# Allegro board comms_command_pc104_revK.brd
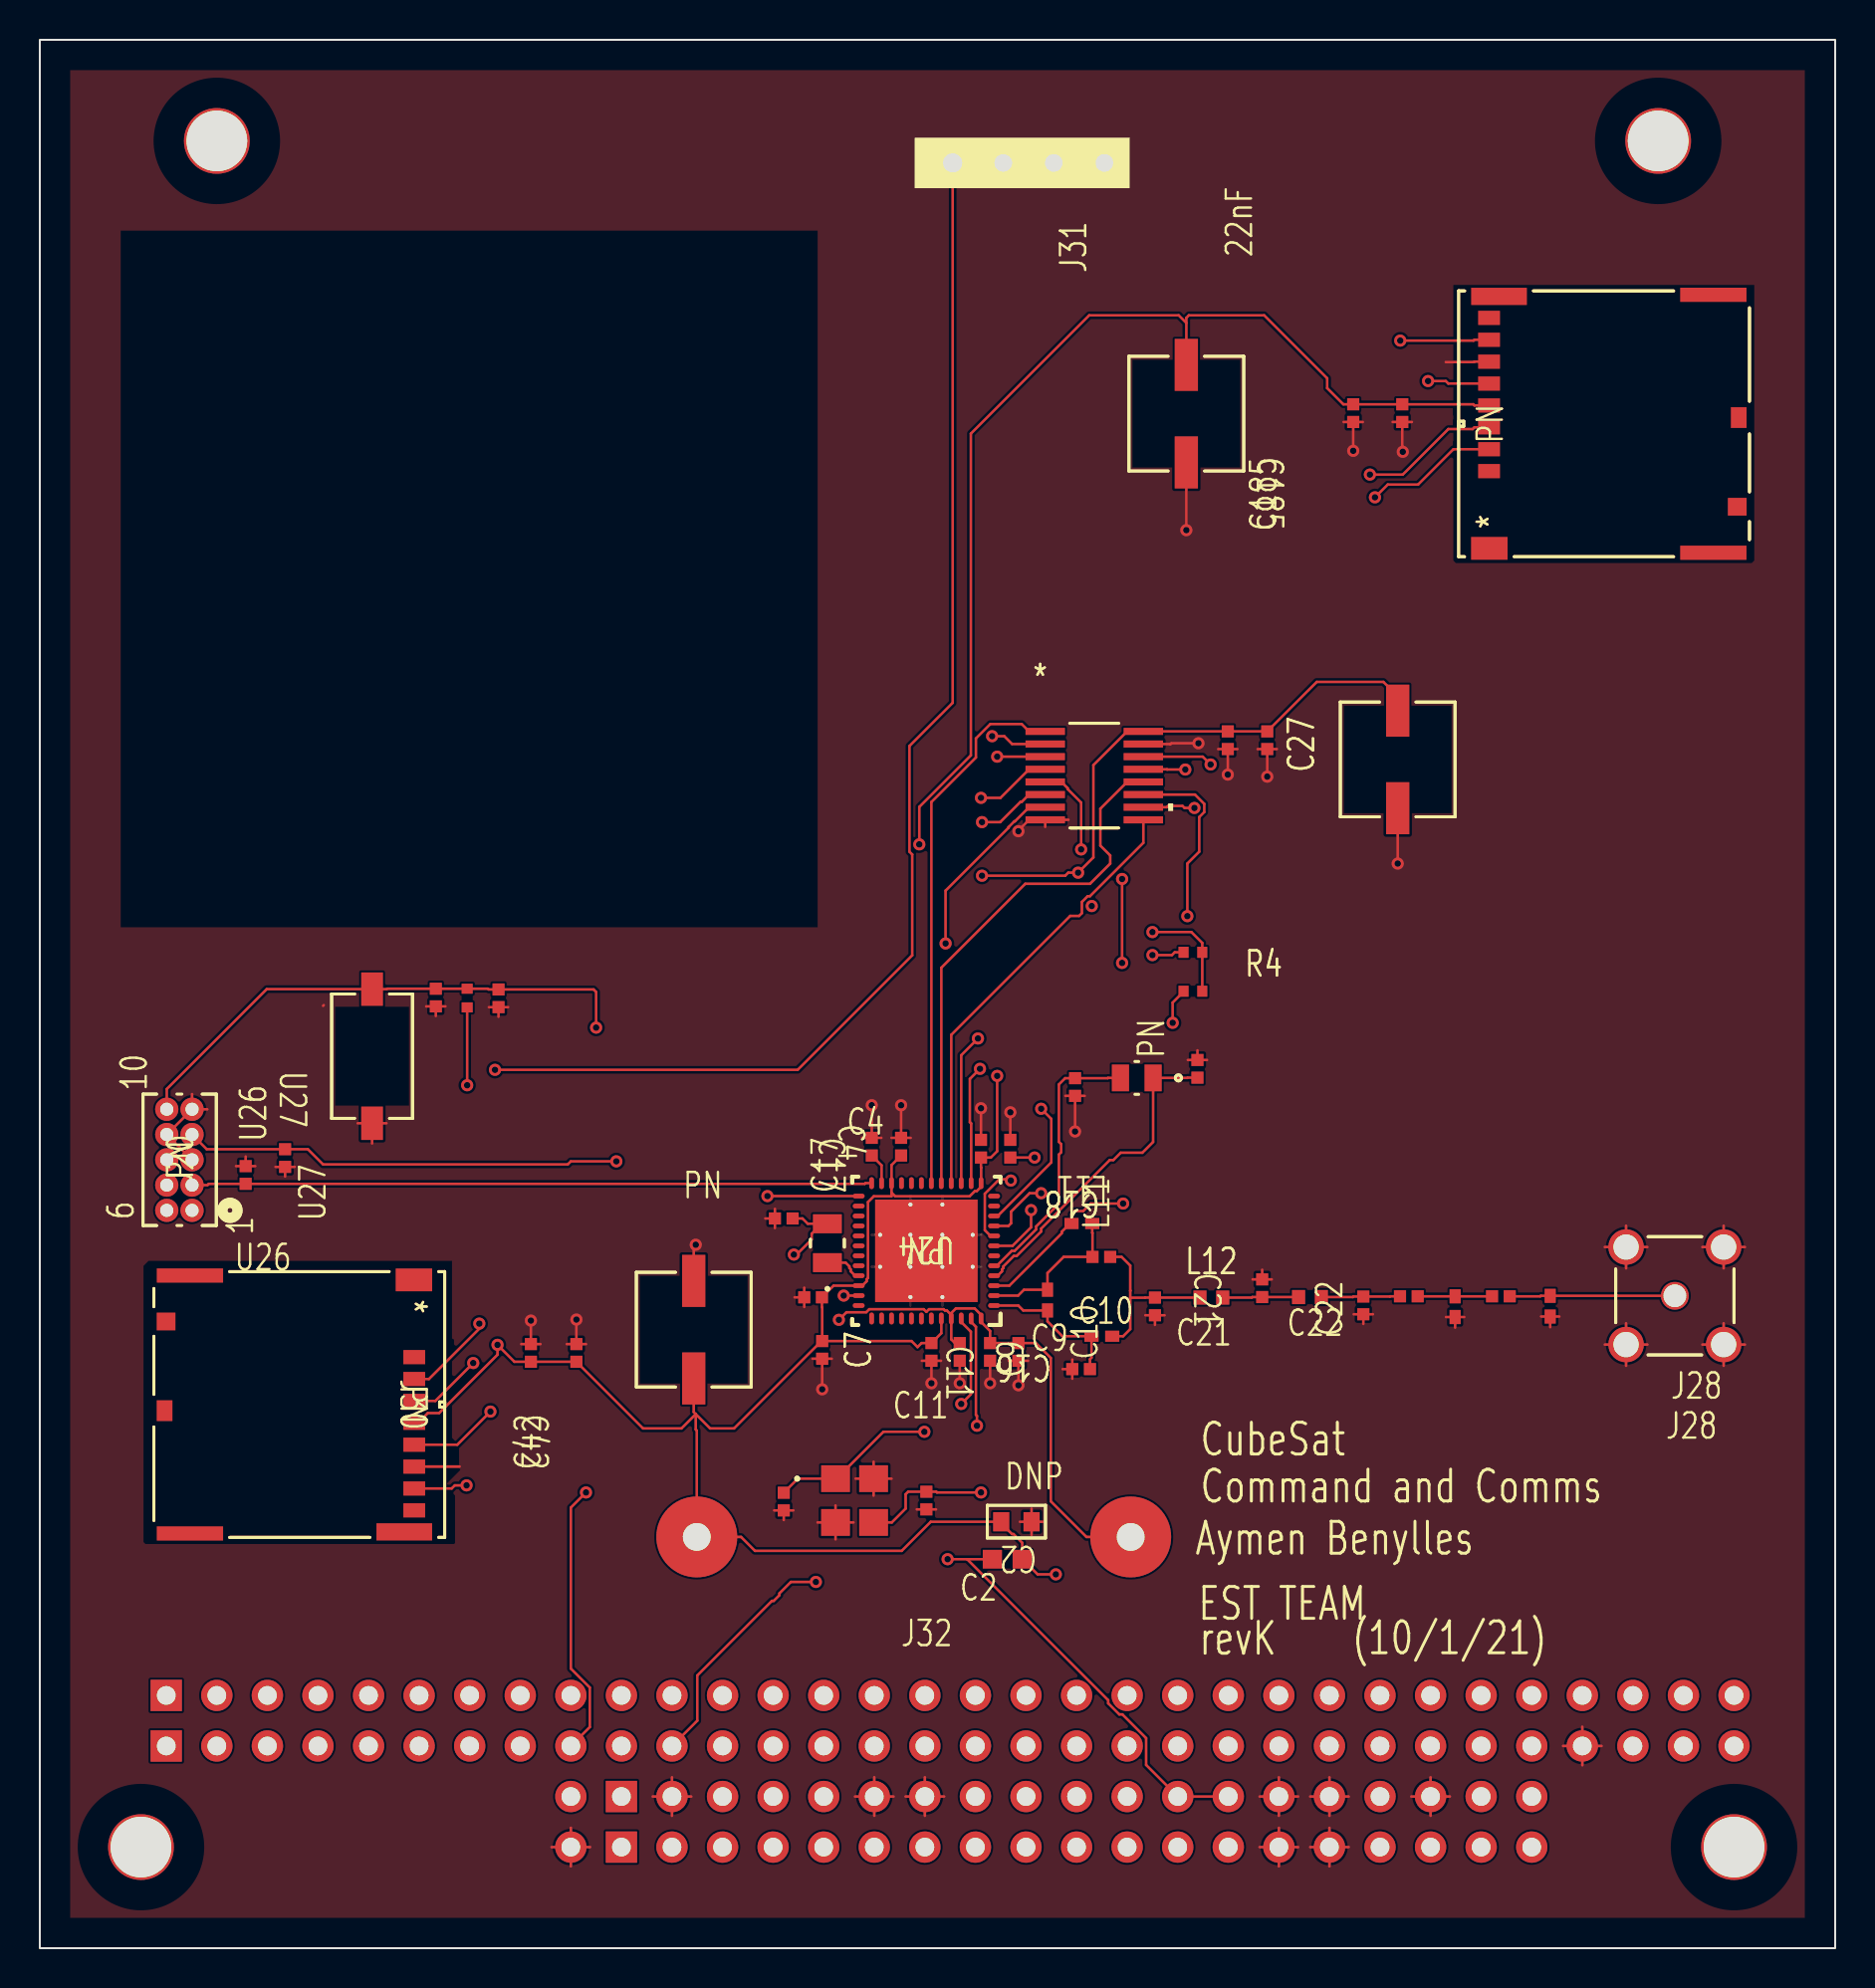
[diagram p0: board, top side]
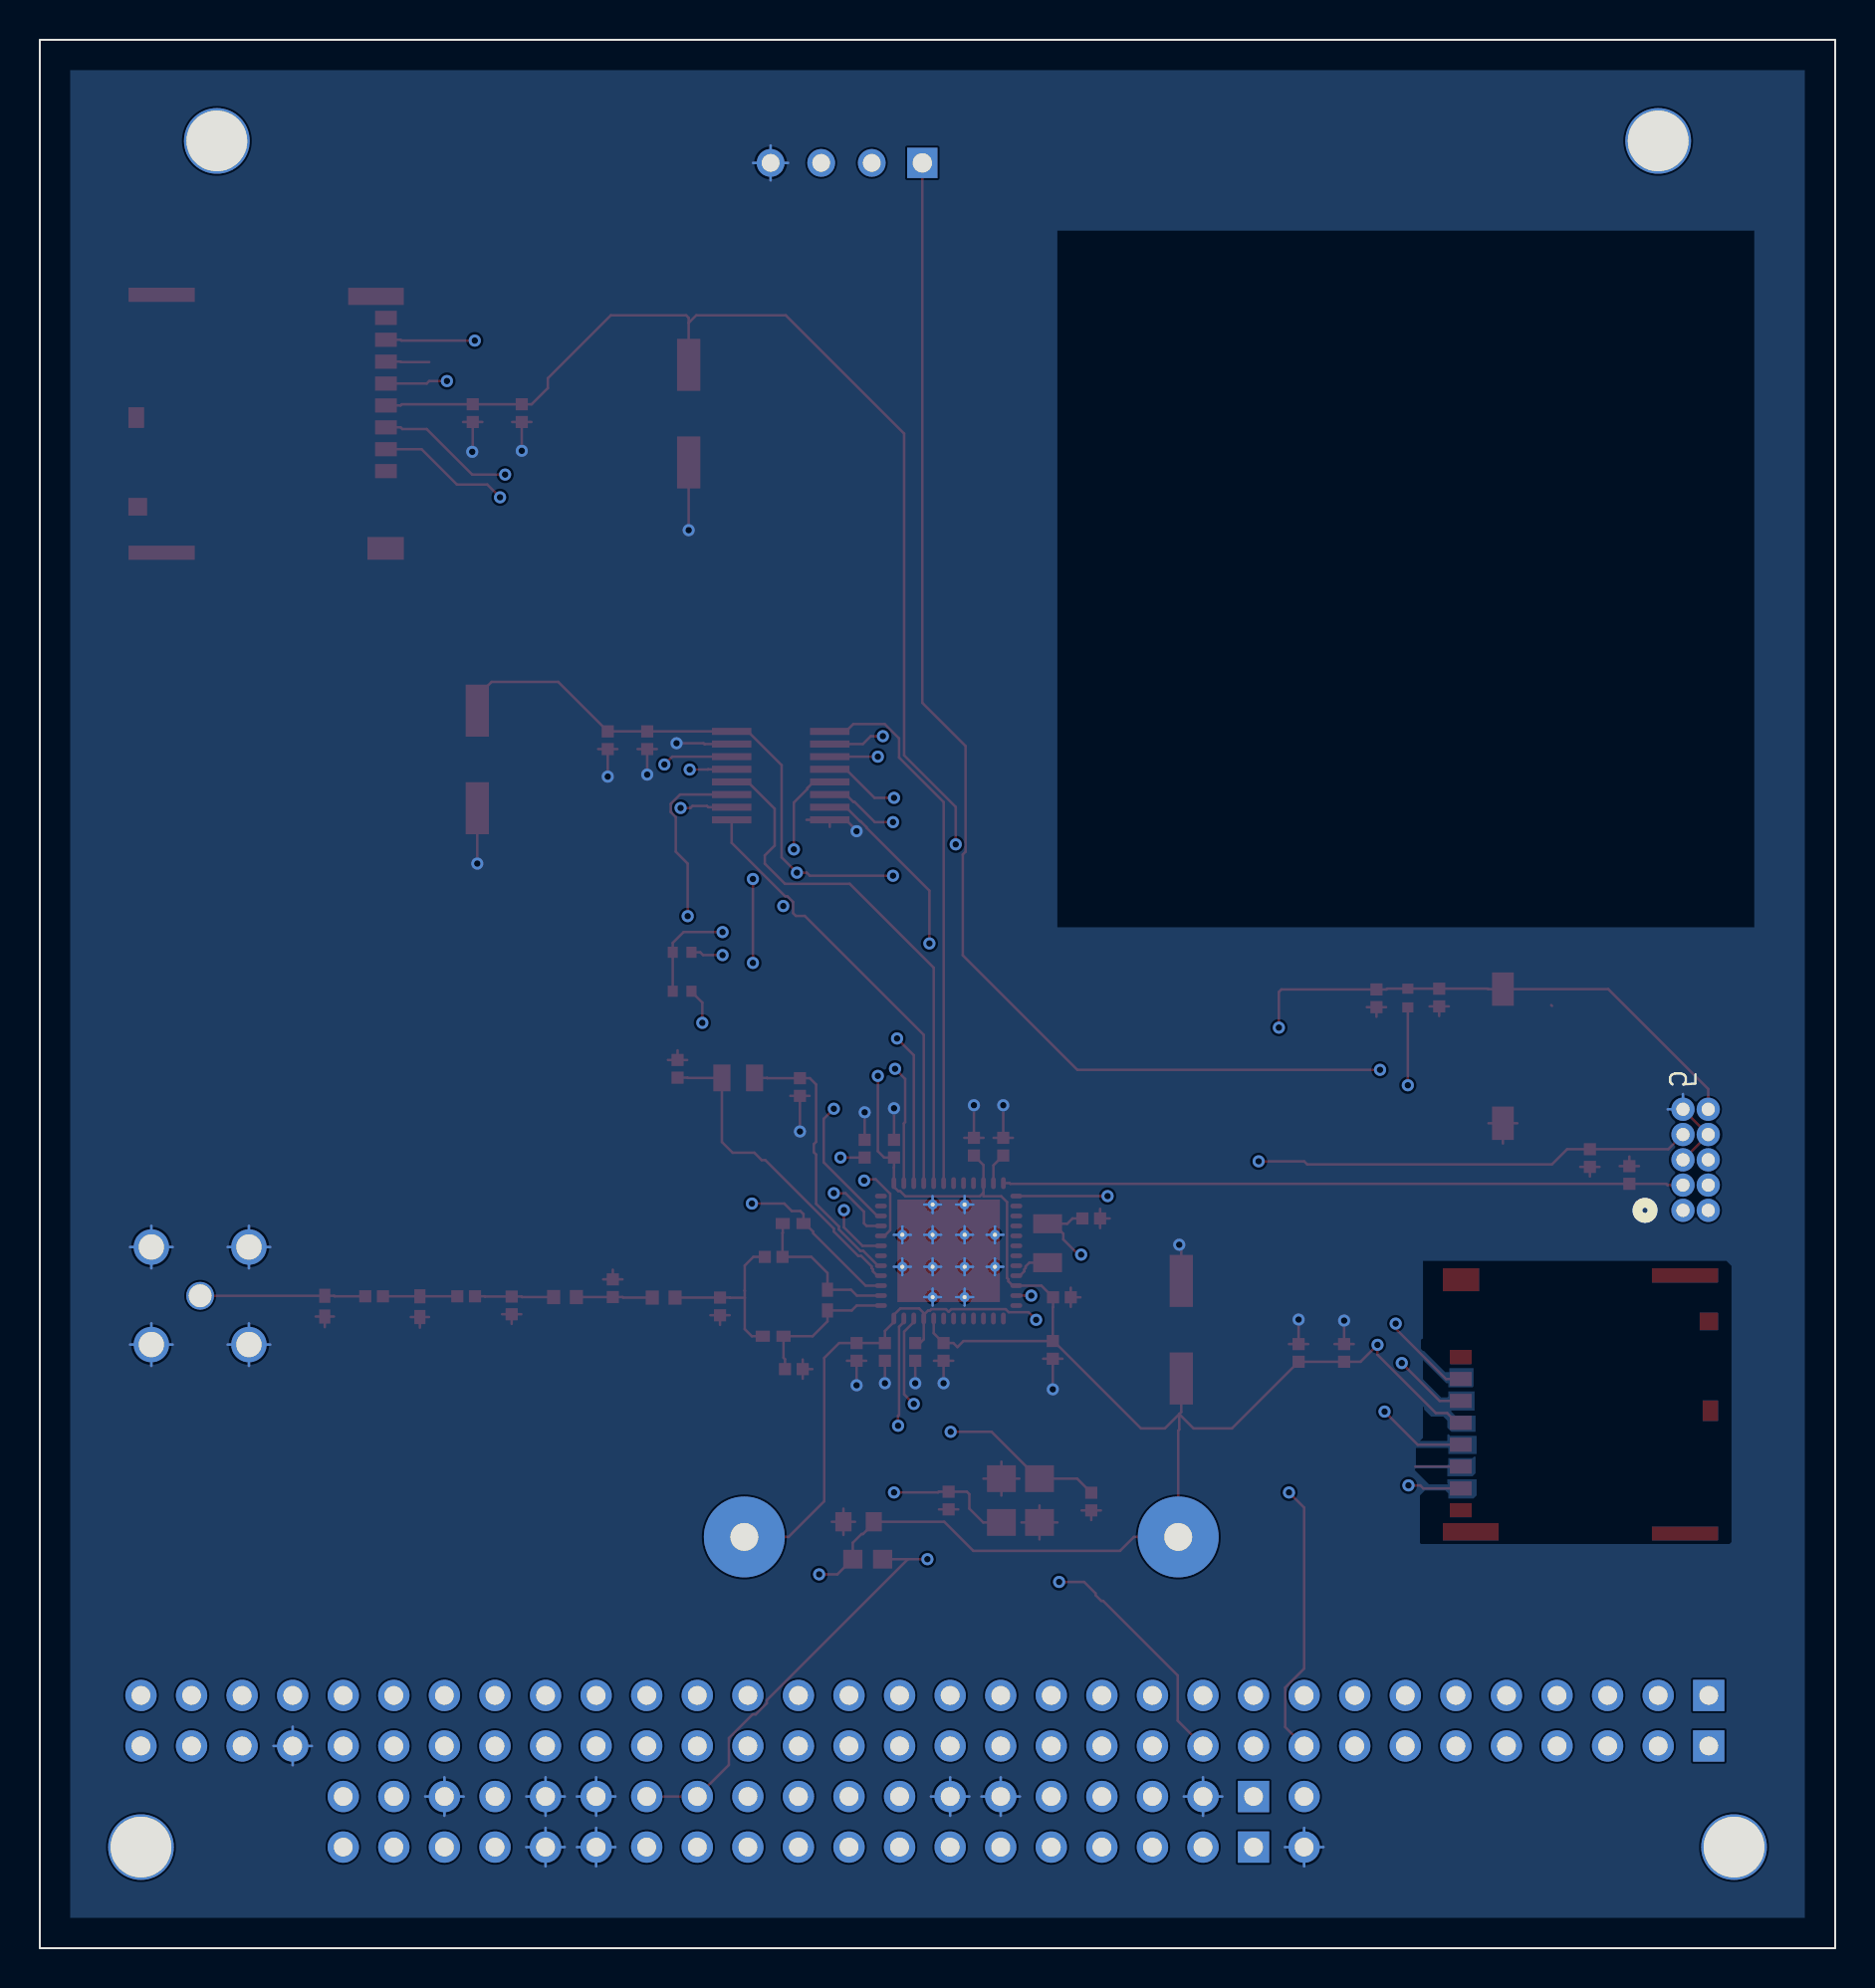
[diagram p1: board, bottom side, seen from below]

Outline 90.17 x 95.89 mm; copper layers: TOP, LAYER2, LAYER3, BOTTOM. Coordinates in mm from the lower left corner of the outline.
Outline path: rectangle 0,0 90.17,95.89

## Design rules (mm)
constraint set DEFAULT: min track width 0.127

## Placement (name value [footprint] x y rotation side)
BLM18HE152SN1D  1.5k  [IND_BLM18_0603_MUR]  48.59 19.55 180 top
C1  2.2nF  [CAP_0402C_AVX]  19.89 47.76 90 top
C2  DNP  [GU-C0603]  49.81 21.42 180 top
C3  0.1uF  [CAP_0402C_AVX]  47.27 40.17 270 top
C4  0.1uF  [CAP_0402C_AVX]  43.26 40.27 270 top
C5  0.1uF  [CAP_0402C_AVX]  44.78 29.96 90 top
C6  22uF  [CAP_0402C_AVX]  38.84 32.7 0 top
C7  0.1uF  [CAP_0402C_AVX]  39.29 30.06 90 top
C8  22uF  [CAP_0402C_AVX]  37.36 36.66 0 top
C9  0.1uF  [CAP_0402C_AVX]  46.2 29.96 90 top
C10  0.1uF  [CAP_0402C_AVX]  47.73 29.96 90 top
C11  DNP  [CAP_0402C_AVX]  49.15 29.96 270 top
C12  DNP  [CAP_0402C_AVX]  37.36 22.44 90 top
C13  DNP  [CAP_0402C_AVX]  44.53 22.49 90 top
C14  12pF  [CAP_0402C_AVX]  51.99 43.27 90 top
C15  12pF  [CAP_0402C_AVX]  58.14 44.18 270 top
C16  8.2pF  [CAP_0402C_AVX]  52.3 29.1 180 top
C17  1uF  [CAP_0402C_AVX]  41.78 40.27 270 top
C18  8.2pF  [CAP_0402C_AVX]  53.31 34.73 180 top
C19  330pF  [CAP_0402C_AVX]  48.74 40.17 270 top
C20  4.7pF  [CAP_0402C_AVX]  56.01 32.25 90 top
C21  12pF  [CAP_0402C_AVX]  61.39 33.16 270 top
C22  4.7pF  [CAP_0402C_AVX]  66.47 32.3 90 top
C23  330pF  [CAP_0402C_AVX]  68.76 32.75 0 top
C24  3.3pF  [CAP_0402C_AVX]  73.38 32.75 0 top
C26  10nF  [CAP_0402C_AVX]  59.66 60.69 90 top
C27  22nF  [CAP_0402C_AVX]  61.65 60.69 90 top
C41  10nF  [CAP_0402C_AVX]  26.95 29.91 270 top
C42  22nF  [CAP_0402C_AVX]  24.66 29.91 270 top
C185  10uF  [CAP_EEE_C_PAN]  57.58 77.1 270 top
C186  10uF  [CAP_EEE_C_PAN]  68.2 59.73 270 top
C187  10uF  [CAP_EEE_C_PAN]  32.84 31.08 90 top
C188  10nF  [CAP_0402C_AVX]  68.43 77.13 90 top
C189  22nF  [CAP_0402C_AVX]  65.96 77.13 90 top
J20  CONNECTOR EDGE 5x2  [CON10_2X5_TU_FTS_SAI]  7.65 37.07 90 top
J28  1-1337581-0  [CONN_1-1337581-0_TYCO]  82.12 32.78 0 top
J29  503398-1892  [503398-1892_MOL]  78.56 76.59 90 top
J30  503398-1892  [503398-1892_MOL]  13.03 27.32 270 top
J31  CON4  [4PIN100MIL]  45.85 89.7 0 top
J32  PC104CON_1  [PC104_16BIT]  41.91 -2.54 0 top
L9  15nH  [IND_LQG15_MUR]  53.34 30.75 0 top
L10  33nH  [IND_LQG15_MUR]  50.61 32.56 90 top
L11  15nH  [IND_LQG15_MUR]  52.34 36.41 180 top
L12  20nH  [IND_LQW15_LOWIND_MUR]  58.84 32.69 0 top
L13  20nH  [IND_LQW15_LOWIND_MUR]  63.79 32.72 0 top
L14  DNP  [IND_LQG15_MUR]  71.08 32.23 270 top
L15  18nH  [IND_LQG15_MUR]  75.86 32.26 270 top
L16  6.8nH  [IND_2012_TDK]  39.56 35.42 90 top
NOREF  -  [unnamed]  5.08 5.08 0 top
NOREF#2  -  [unnamed]  81.28 90.81 0 top
NOREF#3  -  [unnamed]  8.89 90.81 0 top
NOREF#4  -  [unnamed]  85.09 5.08 0 top
R1  47.5k  [RES_CRCW_0402]  21.46 47.74 270 top
R4  10k  [RES_CRCW_0402]  57.91 50.04 0 top
R5  10k  [RES_CRCW_0402]  57.91 48.08 0 top
SW6  SW_PB_SPST  [KSR221GLFS_CNK-M]  16.69 44.82 90 top
TP8  TEST POINT  [GU-HEADER1]  32.99 20.66 0 top
TP9  TEST POINT  [GU-HEADER1]  54.79 20.66 0 top
U24  CC1310F128RGZ  [RGZ0048A]  44.53 35.04 180 top
U25  ADG3257BRQZ  [RQ_16_ADI]  52.96 58.92 0 top
U26  TPD1E10B06DPYR  [CAP_0402C_AVX]  10.34 38.85 90 top
U27  TPD1E10B06DPYR  [CAP_0402C_AVX]  12.32 39.7 270 top
U28  TPD1E10B06DPYR  [CAP_0402C_AVX]  23.04 47.73 270 top
Y1  24MHz  [TSX-322524P0000MF20G-AC3_EPS]  40.92 22.49 0 top
Y2  32.768kHz  [FC-12M32P7680KA-A3_EPS-L]  55.09 43.73 180 top

## Library data of the parts
BLM18HE152SN1D = BLM18HE152SN1D
C1-C7 C9-C24 C26 C27 C41 C42 C188 C189 = C
C8 = C: User Part Number: PN
C185-C187 = C_elect_0
J20 = CONNECTOR EDGE 5x2: User Part Number: PN; Tolerance: TOL
J28 = 1-1337581-0_1
J29 = 503398-1892: User Part Number: PN
J30 = 503398-1892: User Part Number: PN; Tolerance: TOL
J31 = CON4
J32 = PC104CON_1
L9-L16 = LQW15AN33NJ00D
R1 R4 R5 = R
SW6 = SW_PB_SPST
TP8 TP9 = TEST POINT
U24 = CC1310F128RGZR_3: User Part Number: PN; Tolerance: TOL
U25 = ADG3257BRQZ
U26-U28 = TPD1E10B06DPYR_0
Y1 = CRYSTAL1-4/SM_0
Y2 = CRYSTAL: User Part Number: PN

## Footprints (pads in the part's own frame, mm; a bottom-side part is the same pattern mirrored in y, then rotated)
4PIN100MIL
  rect 1.524x1.524 hole 0.965: 1(0,0)
  round 1.397 hole 0.889: 2(2.54,0) 3(5.08,0) 4(7.62,0)
503398-1892_MOL
  rect 0.711x3.327 smd: (-6.48,-5.489) (6.48,-5.489)
  rect 1.143x1.829 smd: (-6.26,5.76)
  rect 0.864x2.794 smd: (6.4,5.276)
  rect 0.711x1.092 smd: 1(-2.38,5.775) 2(-1.28,5.775) 3(-0.18,5.775) 4(0.92,5.775) 5(2.02,5.775) 6(3.12,5.775) 7(4.22,5.775) 8(5.32,5.775)
  rect 0.889x0.94 smd: 9(-4.17,-6.69)
  rect 1.041x0.787 smd: 10(0.31,-6.765)
CAP_0402C_AVX
  rect 0.61x0.61 smd: 1(-0.445,0) 2(0.445,0)
CAP_EEE_C_PAN
  rect 2.616x1.168 smd: 1(-2.451,0) 2(2.451,0)
CON10_2X5_TU_FTS_SAI
  round 1.168 hole 0.66: 1(0,0) 2(1.27,0) 3(2.54,0) 4(3.81,0) 5(5.08,0) 6(0,1.27) 7(1.27,1.27) 8(2.54,1.27) 9(3.81,1.27) 10(5.08,1.27)
CONN_1-1337581-0_TYCO
  round 1.397 hole 1.143: 1(0,0)
  round 1.778 hole 1.27: 2(-2.45,2.45) 3(-2.45,-2.45) 4(2.45,-2.45) 5(2.45,2.45)
FC-12M32P7680KA-A3_EPS-L
  rect 0.864x1.346 smd: 1(-0.821,0) 2(0.821,0)
GU-C0603
  rect 0.813x0.965 smd: 1(0,0) 2(1.524,0)
GU-HEADER1
  round 4.064 hole 1.397: 1(0,0)
IND_2012_TDK
  rect 0.956x1.45 smd: 1(-0.978,0) 2(0.978,0)
IND_BLM18_0603_MUR
  rect 0.965x0.94 smd: 1(-0.749,0) 2(0.749,0)
IND_LQG15_MUR
  rect 0.711x0.559 smd: 1(-0.521,0) 2(0.521,0)
IND_LQW15_LOWIND_MUR
  rect 0.66x0.711 smd: 1(-0.572,0) 2(0.572,0)
KSR221GLFS_CNK-M
  rect 1.676x1.092 smd: 1(-3.371,0) 2(3.371,0)
PC104_16BIT
  rect 1.575x1.575 hole 0.94: 1(-35.56,15.24) 2(-35.56,12.7) 67(-12.7,10.16) 68(-12.7,7.62)
  round 1.575 hole 0.94: 3(-33.02,15.24) 4(-30.48,15.24) 5(-27.94,15.24) 6(-25.4,15.24) 7(-22.86,15.24) 8(-20.32,15.24) 9(-17.78,15.24) 10(-15.24,15.24) 11(-12.7,15.24) 12(-10.16,15.24) 13(-7.62,15.24) 14(-5.08,15.24) 15(-2.54,15.24) 16(0,15.24) 17(2.54,15.24) 18(5.08,15.24) 19(7.62,15.24) 20(10.16,15.24) 21(12.7,15.24) 22(15.24,15.24) 23(17.78,15.24) 24(20.32,15.24) 25(22.86,15.24) 26(25.4,15.24) 27(27.94,15.24) 28(30.48,15.24) 29(33.02,15.24) 30(35.56,15.24) 31(38.1,15.24) 32(40.64,15.24) 33(43.18,15.24) 34(-33.02,12.7) 35(-30.48,12.7) 36(-27.94,12.7) 37(-25.4,12.7) 38(-22.86,12.7) 39(-20.32,12.7) 40(-17.78,12.7) 41(-15.24,12.7) 42(-12.7,12.7) 43(-10.16,12.7) 44(-7.62,12.7) 45(-5.08,12.7) 46(-2.54,12.7) 47(0,12.7) 48(2.54,12.7) 49(5.08,12.7) 50(7.62,12.7) 51(10.16,12.7) 52(12.7,12.7) 53(15.24,12.7) 54(17.78,12.7) 55(20.32,12.7) 56(22.86,12.7) 57(25.4,12.7) 58(27.94,12.7) 59(30.48,12.7) 60(33.02,12.7) 61(35.56,12.7) 62(38.1,12.7) 63(40.64,12.7) 64(43.18,12.7) 65(-15.24,10.16) 66(-15.24,7.62) 69(-10.16,10.16) 70(-7.62,10.16) 71(-5.08,10.16) 72(-2.54,10.16) 73(0,10.16) 74(2.54,10.16) 75(5.08,10.16) 76(7.62,10.16) 77(10.16,10.16) 78(12.7,10.16) 79(15.24,10.16) 80(17.78,10.16) 81(20.32,10.16) 82(22.86,10.16) 83(25.4,10.16) 84(27.94,10.16) 85(30.48,10.16) 86(33.02,10.16) 87(-10.16,7.62) 88(-7.62,7.62) 89(-5.08,7.62) 90(-2.54,7.62) 91(0,7.62) 92(2.54,7.62) 93(5.08,7.62) 94(7.62,7.62) 95(10.16,7.62) 96(12.7,7.62) 97(15.24,7.62) 98(17.78,7.62) 99(20.32,7.62) 100(22.86,7.62) 101(25.4,7.62) 102(27.94,7.62) 103(30.48,7.62) 104(33.02,7.62)
RES_CRCW_0402
  rect 0.508x0.559 smd: 1(-0.47,0) 2(0.47,0)
RGZ0048A
  oval 0.6x0.24 smd: 1(-3.4,2.75) 2(-3.4,2.25) 3(-3.4,1.75) 4(-3.4,1.25) 5(-3.4,0.75) 6(-3.4,0.25) 7(-3.4,-0.25) 8(-3.4,-0.75) 9(-3.4,-1.25) 10(-3.4,-1.75) 11(-3.4,-2.25) 12(-3.4,-2.75) 25(3.4,-2.75) 26(3.4,-2.25) 27(3.4,-1.75) 28(3.4,-1.25) 29(3.4,-0.75) 30(3.4,-0.25) 31(3.4,0.25) 32(3.4,0.75) 33(3.4,1.25) 34(3.4,1.75) 35(3.4,2.25) 36(3.4,2.75)
  oval 0.24x0.6 smd: 13(-2.75,-3.4) 14(-2.25,-3.4) 15(-1.75,-3.4) 16(-1.25,-3.4) 17(-0.75,-3.4) 18(-0.25,-3.4) 19(0.25,-3.4) 20(0.75,-3.4) 21(1.25,-3.4) 22(1.75,-3.4) 23(2.25,-3.4) 24(2.75,-3.4) 37(2.75,3.4) 38(2.25,3.4) 39(1.75,3.4) 40(1.25,3.4) 41(0.75,3.4) 42(0.25,3.4) 43(-0.25,3.4) 44(-0.75,3.4) 45(-1.25,3.4) 46(-1.75,3.4) 47(-2.25,3.4) 48(-2.75,3.4)
  rect 5.15x5.15 smd: 49(0,0)
  round 0.5 hole 0.203: 50(-0.803,2.325) 51(0.803,2.325) 52(-2.325,0.803) 53(-0.803,0.803) 54(0.803,0.803) 55(2.325,0.803) 56(-2.325,-0.803) 57(-0.803,-0.803) 58(0.803,-0.803) 59(2.325,-0.803) 60(-0.803,-2.325) 61(0.803,-2.325)
RQ_16_ADI
  rect 1.981x0.356 smd: 1(-2.464,2.223) 2(-2.464,1.587) 3(-2.464,0.953) 4(-2.464,0.318) 5(-2.464,-0.318) 6(-2.464,-0.953) 7(-2.464,-1.587) 8(-2.464,-2.223) 9(2.464,-2.223) 10(2.464,-1.587) 11(2.464,-0.953) 12(2.464,-0.318) 13(2.464,0.318) 14(2.464,0.953) 15(2.464,1.587) 16(2.464,2.223)
TSX-322524P0000MF20G-AC3_EPS
  rect 1.448x1.346 smd: 1(-0.956,1.1) 2(-0.956,-1.1) 3(0.956,-1.1) 4(0.956,1.1)
unnamed
  round 3.302 hole 3.048: (0,0)

## Nets
3V3BUS: BLM18HE152SN1D.2 J31.1 J32.79 J32.80
GND: C1.1 C2.1 C3.1 C4.1 C5.1 C6.1 C7.1 C8.1 C9.1 C10.1 C11.2 C12.1 C13.1 C14.1 C15.1 C16.2 C17.1 C19.1 C20.1 C21.1 C22.1 C26.1 C27.1 C41.1 C42.1 C185.2(-) C186.2(-) C187.2(-) C188.1 C189.1 J20.3 J20.5 J20.9 J28.2 J28.3 J28.4 J28.5 J29.6(VSS) J30.6(VSS) J31.4 J32.61 J32.66 J32.69 J32.73 J32.74 J32.81 J32.82 J32.84 J32.99 J32.100 L14.2 L15.2 SW6.1 U24.49 U24.50 U24.51 U24.52 U24.53 U24.54 U24.55 U24.56 U24.57 U24.58 U24.59 U24.60 U24.61 U25.8 U25.15 U26.2 U27.2 U28.2 Y1.2 Y1.4
VDDR: C8.2 C9.2 C10.2 C11.1 L16.2 TP9.1 U24.45 U24.48
VDDS: BLM18HE152SN1D.1 C2.2 C3.2 C4.2 C5.2 C6.2 C7.2 C26.2 C27.2 C41.2 C42.2 C185.1 C186.1 C187.1 C188.2 C189.2 J20.1 J29.4 J30.4 R1.2 R4.2 R5.2 TP8.1 U24.13 U24.22 U24.34 U24.44 U25.16(VCC)
/RESET: C1.2 J20.10 R1.1 SW6.2 U24.35 U28.1
CS: U24.17 U25.12
CS(A): J30.2 U25.14
CS(B): J29.2 U25.13
DCDC_SW: L16.1 U24.33
I2C_CLK: J32.43 R4.1 U24.9
I2C_DATA: J32.41 R5.1 U24.10
JTAG_TCK: J20.4 U24.25 U27.1
JTAG_TMS: J20.2 U24.24 U26.1
MISO: U24.14 U25.4
MISO(A): J30.7 U25.2
MISO(B): J29.7 U25.3
MOSI: U24.15 U25.7
MOSI(A): J30.3 U25.5
MOSI(B): J29.3 U25.6
RXD: J31.2 U24.7
S: U24.18 U25.1
SCK: U24.16 U25.9
SCK(A): J30.5 U25.11
SCK(B): J29.5 U25.10
TXD: J31.3 U24.8
N230360: C12.2 U24.47 Y1.1
N230438: C13.2 U24.46 Y1.3
N230478: C14.2 U24.5(X32K_Q2) Y2.2
N230498: C15.2 U24.4 Y2.1
N230506: C16.1 L9.1 L10.1 U24.1
N230650: C18.1 C20.2 L9.2 L12.1
N230674: C19.2 L11.2 U24.3
N230786: C21.2 L12.2 L13.1
N230798: C22.2 C23.1 L13.2
N230810: C23.2 C24.1 L14.1
N230822: C24.2 J28.1 L15.1
N230838: C18.2 L10.2 L11.1 U24.2
N230878: C17.2 U24.23

Pads without a net: J20 6 7 8; J29 1 8 9 10; J30 1 8 9 10; J32 1 2 3 4 5 6 7 8 9 10 11 12 13 14 15 16 17 18 19 20 21 22 23 24 25 26 27 28 29 30 31 32 33 34 35 36 37 38 39 40 42 44 45 46 47 48 49 50 51 52 53 54 55 56 57 58 59 60 62 63 64 65 67 68 70 71 72 75 76 77 78 83 85 86 87 88 89 90 91 92 93 94 95 96 97 98 101 102 103 104; U24 6 11 12 19 20 21 26 27 28 29 30 31 32 36 37 38 39 40 41 42 43

## Via types
v1: diameter 0.61, hole 0.33, TOP to BOTTOM, 74 vias

## Routing (per net, layer and track width the routed paths; a pad name or vN(x,y) marks a point on that pad's centre or on a via; arc(x,y) is an arc through that point)
3V3BUS: length 122.2
  TOP w0.127: 46.57,19.55 53.66,12.46 53.66,12.31 54.22,11.75 54.37,11.75 55.56,10.55 55.56,9.21 J32.79 J32.80 ; 46.57,19.55 BLM18HE152SN1D.2 ; 46.57,19.55 v1(45.59,19.55) ; v1(22.86,44.13) 38.06,44.13 43.81,49.89 43.81,54.95 43.68,55.09 43.68,60.4 45.85,62.57 J31.1
  LAYER3 w0.127: v1(22.86,44.13) 24.41,42.58 24.41,35.75 40.61,19.55 v1(45.59,19.55)
GND: length 231.3
  TOP w0.127: 26.67,4.11 J32.66 ; J32.66 25.7,5.08 ; J32.66 27.64,5.08 ; J32.66 26.67,6.05 ; C186.2 v1(68.2,54.5) ; C17.1 v1(41.78,42.35) ; C17.1 42.27,40.72 ; C17.1 41.3,40.72 ; 62.23,4.11 J32.99 ; J32.99 63.2,5.08 ; J32.99 61.26,5.08 ; J32.99 62.23,6.05 ; J32.84 69.85,8.59 ; J32.84 68.88,7.62 ; J32.84 70.82,7.62 ; J32.84 69.85,6.65 ; 77.47,9.19 J32.61 ; J32.61 77.47,11.13 ; J32.61 76.5,10.16 ; J32.61 78.44,10.16 ; C11.2 v1(49.15,28.28) ; C11.2 48.67,29.51 ; C11.2 49.63,29.51 ; J20.5 8.41,42.15 ; J20.5 7.65,42.91 ; J20.5 J20.9 J20.3 ; 59.18,60.25 C26.1 ; C26.1 v1(59.66,58.97) ; C26.1 60.15,60.25 ; U25.15 56.77,60.5 56.78,60.49 56.83,60.54 v1(58.19,60.54) ; 57.66,44.63 C15.1 ; C15.1 58.14,45.11 ; C15.1 58.62,44.63 ; J31.4 54.34,89.7 ; J31.4 52.59,89.7 ; J31.4 53.47,90.58 ; J31.4 53.47,88.82 ; 71.08,31.18 L14.2 ; L14.2 71.54,31.71 ; L14.2 70.62,31.71 ; C4.1 v1(43.26,42.35) ; C4.1 43.74,40.72 ; C4.1 42.77,40.72 ; Y1.4 42.78,23.59 ; Y1.4 41.88,24.44 ; Y1.4 41.88,22.74 ; Y1.4 40.97,23.59 ; 61.26,7.62 J32.81 ; J32.81 62.23,8.59 ; J32.81 63.2,7.62 ; J32.81 62.23,6.65 ; 83.5,35.23 J28.5 ; J28.5 84.57,36.3 ; J28.5 84.57,34.16 ; J28.5 85.64,35.23 ; 65.48,76.68 C189.1 ; C189.1 66.45,76.68 ; C189.1 v1(65.96,75.23) 65.91,75.18 ; 56.01,31.32 C20.1 ; C20.1 56.49,31.8 ; C20.1 55.52,31.8 ; C21.1 61.87,33.6 ; C21.1 60.91,33.6 ; C21.1 61.39,34.09 ; 75.86,31.2 L15.2 ; L15.2 76.31,31.74 ; L15.2 75.4,31.74 ; C22.1 66.95,31.85 ; C22.1 65.99,31.85 ; C22.1 66.47,31.37 ; 43.48,7.62 J32.74 ; J32.74 45.42,7.62 ; J32.74 44.45,8.59 ; J32.74 44.45,6.65 ; 39.06,21.39 Y1.2 ; Y1.2 39.96,20.54 ; Y1.2 39.96,22.24 ; Y1.2 40.87,21.39 ; J28.2 79.67,36.3 ; J28.2 79.67,34.16 ; J28.2 78.6,35.23 ; J28.2 80.74,35.23 ; C16.2 51.85,29.58 ; C16.2 51.37,29.1 ; C16.2 51.85,28.61 ; J28.4 84.57,31.4 ; J28.4 85.64,30.33 ; J28.4 83.5,30.33 ; J28.4 84.57,29.26 ; J32.73 41.91,8.59 ; J32.73 42.88,7.62 ; J32.73 41.91,6.65 ; J32.73 40.94,7.62 ; 19.89,46.84 C1.1 ; C1.1 20.37,47.32 ; C1.1 19.41,47.32 ; 45.01,22.05 C13.1 44.04,22.05 ; 44.3,29.51 C5.1 ; C5.1 45.26,29.51 ; C5.1 v1(44.78,28.38) ; U26.2 10.82,39.29 ; U26.2 10.34,39.78 ; U26.2 9.85,39.29 ; 61.16,60.25 C27.1 ; C27.1 62.13,60.25 ; C27.1 v1(61.65,58.86) ; 49.81,20.76 C2.1 ; C2.1 49.22,21.42 ; C2.1 50.39,21.42 ; C2.1 49.81,22.09 ; 12.32,38.77 U27.2 ; U27.2 11.84,39.26 ; U27.2 12.8,39.26 ; C7.1 39.78,29.62 ; C7.1 v1(39.29,28.08) ; C7.1 38.81,29.62 ; J32.82 64.77,8.59 ; J32.82 64.77,6.65 ; J32.82 65.74,7.62 ; J32.82 63.8,7.62 ; C14.1 v1(51.99,41.03) ; C14.1 51.51,42.82 ; C14.1 52.48,42.82 ; 38.39,32.22 C6.1 ; C6.1 37.91,32.7 ; C6.1 38.39,33.19 ; 24.18,30.35 C42.1 ; C42.1 25.15,30.35 ; C42.1 v1(24.66,31.53) ; 63.8,5.08 J32.100 ; J32.100 65.74,5.08 ; J32.100 64.77,4.11 ; J32.100 64.77,6.05 ; C12.1 37.85,22 ; C12.1 37.36,21.51 ; C12.1 36.88,22 ; 31.75,6.65 J32.69 ; J32.69 31.75,8.59 ; J32.69 30.78,7.62 ; J32.69 32.72,7.62 ; J29.6 72.05,79.71 72.03,79.69 70.61,79.69 ; SW6.1 17.41,41.45 ; SW6.1 16.69,40.43 ; SW6.1 15.96,41.45 ; v1(32.94,35.34) 32.84,35.24 C187.2 ; 14.22,47.35 14.26,47.38 ; 22.55,47.28 U28.2 ; U28.2 23.04,46.8 ; U28.2 23.52,47.28 ; J28.3 80.74,30.33 ; J28.3 79.67,29.26 ; J28.3 79.67,31.4 ; J28.3 78.6,30.33 ; v1(68.45,75.18) 68.45,75.44 68.43,75.46 C188.1 ; 36.44,36.66 C8.1 ; C8.1 36.92,36.18 ; C8.1 36.92,37.15 ; 50.5,56.34 U25.8 ; U25.8 51.66,56.69 ; U25.8 49.68,56.69 49.15,56.16 v1(49.15,56.12) 49.15,56.07 ; 26.47,30.35 C41.1 ; C41.1 27.43,30.35 ; C41.1 v1(26.95,31.58) ; C19.1 v1(48.74,42) ; J30.6 21.09,24.2 ; 67.94,76.68 C188.1 ; C188.1 68.91,76.68 ; C185.2 v1(57.58,71.25) ; C10.1 v1(47.73,28.38) ; C9.1 v1(46.2,28.38) ; C3.1 v1(47.27,42.2)
  BOTTOM w0.127: 44.9,37.36 U24.60 ; U24.60 45.33,36.94 ; U24.60 45.76,37.36 ; U24.60 45.33,37.79 ; J32.74 44.45,8.59 ; J32.74 45.42,7.62 ; J32.74 44.45,6.65 ; J32.74 43.48,7.62 ; 41.77,34.24 U24.55 ; U24.55 42.2,33.81 ; U24.55 42.2,34.66 ; U24.55 42.63,34.24 ; 78.6,30.33 J28.3 ; J28.3 79.67,29.26 ; J28.3 80.74,30.33 ; J28.3 79.67,31.4 ; 46.42,34.24 U24.52 ; U24.52 47.28,34.24 ; U24.52 46.85,34.66 ; U24.52 46.85,33.81 ; U24.51 43.72,33.14 ; U24.51 44.15,32.71 ; U24.51 43.29,32.71 ; U24.51 43.72,32.29 ; 79.67,34.16 J28.2 ; J28.2 80.74,35.23 ; J28.2 79.67,36.3 ; J28.2 78.6,35.23 ; 43.29,37.36 U24.61 ; U24.61 44.15,37.36 ; U24.61 43.72,37.79 ; U24.61 43.72,36.94 ; 64.77,4.11 J32.100 ; J32.100 63.8,5.08 ; J32.100 64.77,6.05 ; J32.100 65.74,5.08 ; J32.73 41.91,8.59 ; J32.73 42.88,7.62 ; J32.73 41.91,6.65 ; J32.73 40.94,7.62 ; 41.77,35.84 U24.59 ; U24.59 42.2,36.27 ; U24.59 42.63,35.84 ; U24.59 42.2,35.41 ; 62.23,4.11 J32.99 ; J32.99 62.23,6.05 ; J32.99 61.26,5.08 ; J32.99 63.2,5.08 ; J32.69 31.75,8.59 ; J32.69 31.75,6.65 ; J32.69 30.78,7.62 ; J32.69 32.72,7.62 ; 52.59,89.7 J31.4 ; J31.4 53.47,88.82 ; J31.4 54.34,89.7 ; J31.4 53.47,90.58 ; J32.61 77.47,11.13 ; J32.61 78.44,10.16 ; J32.61 77.47,9.19 ; J32.61 76.5,10.16 ; 44.9,35.84 U24.57 ; U24.57 45.33,36.27 ; U24.57 45.33,35.41 ; U24.57 45.76,35.84 ; 45.33,33.81 U24.53 ; U24.53 45.33,34.66 ; U24.53 44.9,34.24 ; U24.53 45.76,34.24 ; J32.82 65.74,7.62 ; J32.82 64.77,8.59 ; J32.82 64.77,6.65 ; J32.82 63.8,7.62 ; U24.56 47.28,35.84 ; U24.56 46.85,35.41 ; U24.56 46.42,35.84 ; U24.56 46.85,36.27 ; 43.72,33.81 U24.54 ; U24.54 44.15,34.24 ; U24.54 43.72,34.66 ; U24.54 43.29,34.24 ; J32.84 70.82,7.62 ; J32.84 69.85,6.65 ; J32.84 68.88,7.62 ; J32.84 69.85,8.59 ; 43.72,35.41 U24.58 ; U24.58 44.15,35.84 ; U24.58 43.29,35.84 ; U24.58 43.72,36.27 ; J32.66 26.67,6.05 ; J32.66 27.64,5.08 ; J32.66 25.7,5.08 ; J32.66 26.67,4.11 ; U24.50 45.33,33.14 ; U24.50 45.33,32.29 ; U24.50 44.9,32.71 ; U24.50 45.76,32.71 ; 83.5,35.23 J28.5 ; J28.5 85.64,35.23 ; J28.5 84.57,36.3 ; J28.5 84.57,34.16 ; J32.81 63.2,7.62 ; J32.81 61.26,7.62 ; J32.81 62.23,6.65 ; J32.81 62.23,8.59 ; 8.41,42.15 J20.5 7.65,42.91 ; 83.5,30.33 J28.4 ; J28.4 84.57,31.4 ; J28.4 85.64,30.33 ; J28.4 84.57,29.26
VDDR: length 35.6
  TOP w0.127: v1(37.87,34.85) 38.01,34.85 38.77,35.61 38.77,35.9 39.27,36.4 ; 39.27,36.4 L16.2 ; 39.27,36.4 38.57,36.4 38.3,36.66 C8.2 ; 45.78,31.82 45.56,32.04 45.46,32.04 45.39,32.1 44.66,32.1 44.53,31.97 44.39,32.1 41.66,32.1 41.51,31.95 40.51,31.95 v1(40.13,31.57) ; 45.78,31.82 U24.45 45.78,30.59 45.96,30.4 C9.2 ; 45.78,31.82 45.78,31.91 46.01,32.14 46.95,32.14 47.28,31.82 U24.48 47.28,31.46 47.73,31.01 C10.2 C11.1 50.03,30.4 50.77,29.65 50.77,22.45 52.57,20.66 TP9.1
  LAYER3 w0.127: v1(37.87,34.85) 37.87,34.34 38.73,33.48 38.73,31.7 38.86,31.57 v1(40.13,31.57)
VDDS: length 231.1
  TOP w0.127: R5.2 R4.2 58.38,50.51 57.84,51.05 v1(55.88,51.05) ; 32.94,26.84 32.22,26.12 30.3,26.12 C41.2 C42.2 23.84,29.46 v1(22.99,30.31) 22.99,29.82 20.06,26.89 19.49,26.89 19,26.4 J30.4 ; 32.94,26.84 33.66,26.12 34.87,26.12 39.25,30.51 C7.2 ; 32.94,26.84 32.94,26.06 32.99,26.01 TP8.1 35.22,20.66 35.92,19.96 43.29,19.96 44.75,21.42 C2.2 48.29,21.35 48.83,20.81 48.9,20.81 49.34,20.37 BLM18HE152SN1D.1 49.35,19.55 50.11,18.78 v1(51.03,18.78) ; 32.94,26.84 32.84,26.94 C187.1 ; U24.44 45.28,30.9 C5.2 44.28,30.4 44.08,30.2 43.78,30.51 C7.2 ; 57.58,81.66 C185.1 ; 57.58,81.66 57.58,81.92 57.71,82.04 61.49,82.04 64.66,78.88 64.66,78.38 65.47,77.57 C189.2 C188.2 71.99,77.57 72.05,77.51 J29.4 ; 57.58,81.66 57.2,82.04 52.7,82.04 46.76,76.1 46.76,59.93 44.17,57.34 v1(44.17,55.46) ; C4.2 42.78,39.35 U24.22 42.78,37.96 ; 42.78,37.96 42.78,37.78 41.88,37.78 41.59,37.49 41.59,33.67 41.53,33.61 41.53,33.51 41.31,33.29 U24.34 39.87,33.29 C6.2 39.28,32.21 39.29,32.19 C7.2 ; 42.78,37.96 42.96,37.78 46.7,37.78 46.96,38.04 47.06,38.04 47.28,38.26 U24.13 47.28,39.22 47.27,39.23 C3.2 47.76,39.73 48.08,40.04 v1(48.08,43.83) ; C186.1 68.2,62.9 67.48,63.62 64.13,63.62 C27.2 C26.2 U25.16 54.61,61.14 52.91,59.44 52.91,54.81 v1(52.15,54.04) 51.65,54.04 51.5,53.89 v1(47.32,53.89) ; R1.2 v1(21.46,43.36)
  LAYER3 w0.127: 21.34,37.07 22.07,37.07 22.99,36.16 v1(22.99,30.31) ; 21.34,37.07 J20.1 ; 21.34,37.07 21.46,37.2 v1(21.46,43.36) ; v1(44.17,55.46) 45.75,53.89 v1(47.32,53.89) ; v1(48.08,43.83) 48.08,44.49 48.51,44.92 48.51,52.59 50.62,54.7 51.49,54.7 v1(52.15,54.04) 51.07,52.96 51.07,52.39 52.4,51.05 v1(55.88,51.05)
/RESET: length 47.4
  TOP w0.127: J20.10 6.38,43.17 11.4,48.19 SW6.2 17.42,48.19 17.44,48.21 C1.2 R1.1 22.5,48.21 22.54,48.17 U28.1 27.81,48.17 27.94,48.04 v1(27.94,46.25) ; U24.35 v1(40.38,32.79)
  LAYER3 w0.127: v1(40.38,32.79) 40.38,36.45 30.57,46.25 v1(27.94,46.25)
CS: length 27.2
  TOP w0.127: U24.17 45.28,49.26 49.49,53.48 52.75,53.48 53.76,54.49 53.76,54.9 53.26,55.4 53.26,57.25 54.61,58.6 U25.12
CS(A): length 60.6
  TOP w0.127: v1(58.8,59.47) 58.41,59.87 U25.14 ; J30.2 19.54,28.6 22.07,31.13 v1(22.07,31.38)
  LAYER2 w0.127: v1(22.07,31.38) 22.07,31.88 43.05,52.86 58.67,52.86 58.8,52.98 v1(58.8,59.47)
CS(B): length 26.5
  TOP w0.127: v1(57.53,59.22) 56.62,59.22 56.6,59.23 U25.13 ; v1(67.06,72.9) 67.7,73.54 69.22,73.54 71,75.31 J29.2
  LAYER2 w0.127: v1(67.06,72.9) 67.06,70.52 57.7,61.16 57.7,60.34 57.78,60.25 57.78,59.47 v1(57.53,59.22)
DCDC_SW: length 1.9
  TOP w0.127: U24.33 40.95,33.79 40.73,34.01 40.73,34.11 40.66,34.17 40.66,34.25 40.47,34.44 L16.1
I2C_CLK: length 60.1
  TOP w0.127: J32.43 33.02,11.43 33.02,13.7 36.77,17.45 36.86,17.45 37.15,17.74 37.15,17.83 37.72,18.4 v1(38.98,18.4) ; U24.9 48.65,36.29 48.78,36.42 48.78,37.01 49.71,37.93 v1(50.29,37.93) ; v1(55.88,49.9) 56.86,49.9 57,50.04 R4.1
  LAYER2 w0.127: v1(38.98,18.4) 38.98,19.98 41.63,22.63 41.63,27.29 50.29,35.95 v1(50.29,37.93) 54.83,37.93 56.9,40.01 56.9,45.79 57.39,46.29 57.39,46.7 55.88,48.21 v1(55.88,49.9)
  LAYER3 w0.127: v1(50.29,37.93) 50.29,37.3 50.28,37.29
I2C_DATA: length 62.6
  TOP w0.127: U24.10 48.11,36.79 50.8,39.48 50.8,41.67 v1(50.29,42.18) ; J32.41 27.62,11.11 27.62,13.09 26.67,14.05 26.67,22.14 v1(27.43,22.9) ; v1(56.9,46.49) 56.9,47.51 57.44,48.06 R5.1
  LAYER2 w0.127: v1(56.9,46.49) 54.61,46.49 v1(50.29,42.18) 46.16,38.05 45.22,38.05 41.52,34.34 41.52,33.23 40.58,32.29 40.12,32.29 39.51,31.69 39.51,31.39 31.01,22.9 v1(27.43,22.9)
JTAG_TCK: length 34.9
  TOP w0.127: J20.4 8.38,40.14 U27.1 13.46,40.14 14.22,39.38 26.52,39.38 26.67,39.54 v1(28.96,39.54) ; U24.25 v1(36.54,37.79)
  LAYER3 w0.127: v1(28.96,39.54) 31.39,39.54 33.14,37.79 v1(36.54,37.79)
JTAG_TMS: length 34.2
  TOP w0.127: J20.2 8.42,38.34 8.48,38.4 U26.1 41.43,38.4 41.47,38.44 U24.24
MISO: length 24.2
  TOP w0.127: U25.4 49.68,59.23 48.25,57.8 v1(47.27,57.8) ; v1(47.22,44.18) 46.71,43.68 46.71,41.5 46.78,41.44 U24.14
  LAYER3 w0.127: v1(47.27,57.8) 48.15,56.92 48.15,45.11 v1(47.22,44.18)
MISO(A): length 55
  TOP w0.127: v1(21.43,23.25) 20.84,23.25 20.69,23.1 J30.7 ; U25.2 48.83,60.5 48.44,60.9 v1(47.83,60.9)
  LAYER2 w0.127: v1(47.83,60.9) 47.83,60.31 47.59,60.07 47.59,59.94 41.66,54.01 41.66,53.36 22.82,34.53 21.56,34.53 21.41,34.38 21.41,29.75 21.27,29.61 21.27,29.2 21.43,29.04 v1(21.43,23.25)
MISO(B): length 36.6
  TOP w0.127: v1(68.33,80.77) 72.01,80.77 72.05,80.81 J29.7 ; v1(48.08,59.87) U25.3
  LAYER2 w0.127: v1(68.33,80.77) 68.33,79.41 48.78,59.87 v1(48.08,59.87)
MOSI: length 22.5
  TOP w0.127: v1(45.49,50.48) 45.49,53.14 48.65,56.3 48.65,56.33 48.94,56.62 48.97,56.62 49.68,57.33 U25.7 ; U24.15 46.28,44.87 v1(47.12,45.71)
  LAYER3 w0.127: v1(45.49,50.48) 47.12,48.86 v1(47.12,45.71)
MOSI(A): length 53
  TOP w0.127: v1(52.3,55.21) 52.3,57.56 51.62,58.24 51.62,58.29 51.31,58.6 U25.5 ; v1(21.77,29.4) 19.87,27.5 J30.3
  LAYER2 w0.127: v1(21.77,29.4) 21.77,30.38 22.57,31.18 22.57,31.67 43.26,52.36 v1(52.83,52.36)
  LAYER3 w0.127: v1(52.83,52.36) 52.83,52.86 52.96,52.98 52.96,54.55 v1(52.3,55.21)
MOSI(B): length 37.7
  TOP w0.127: v1(47.32,56.58) 48.23,56.58 49.25,57.59 49.31,57.59 49.68,57.96 U25.6 ; v1(66.8,74.04) 68.45,74.04 70.74,76.33 71.96,76.33 72.05,76.41 J29.3
  LAYER2 w0.127: v1(66.8,74.04) 64.78,74.04 48.64,57.9 48.64,57.49 47.73,56.58 v1(47.32,56.58)
RXD: length 60.7
  TOP w0.127: v1(54.36,49.5) v1(54.36,53.72) ; U24.7 48.85,35.29 49.78,36.22 v1(49.78,37.08)
  LAYER3 w0.127: v1(54.36,49.5) 49.28,44.42 49.28,42.53 49.49,42.31 49.49,41.69 49.28,41.47 49.28,37.59 v1(49.78,37.08) ; J31.2 48.39,81.32 54.36,75.35 v1(54.36,53.72)
S: length 27.2
  TOP w0.127: U25.1 49.68,61.14 49.31,61.51 47.74,61.51 47.02,60.78 47.02,59.83 44.78,57.59 U24.18
SCK: length 22.6
  TOP w0.127: U25.9 55.42,55.54 52.74,52.86 52.63,52.86 52.34,52.57 52.34,52 52.2,51.87 51.75,51.87 45.78,45.89 U24.16
SCK(A): length 61.7
  TOP w0.127: J30.5 20.97,25.3 v1(22.63,26.96) ; U25.11 58.02,57.96 58.48,57.49 58.48,57.08 58.23,56.83 58.23,55.09 57.63,54.5 v1(57.63,51.85)
  LAYER2 w0.127: v1(57.63,51.85) 43.31,51.85 22.82,31.37 22.82,31.07 22.49,30.74 22.49,30.11 22.63,29.97 v1(22.63,26.96)
SCK(B): length 32.7
  TOP w0.127: v1(69.72,78.74) 70.61,78.74 70.74,78.61 J29.5 ; U25.10 56.6,57.33 56.67,57.39 57.39,57.39 57.49,57.29 v1(57.99,57.29)
  LAYER2 w0.127: v1(57.99,57.29) 57.99,58.98 58.03,59.01 58.03,59.36 58.04,59.37 58.04,59.47 67.56,69 67.56,77.6 68.71,78.74 v1(69.72,78.74)
TXD: length 66.9
  TOP w0.127: v1(48.77,38.57) 48.7,38.63 48.19,38.63 47.46,37.91 47.46,36.07 47.75,35.79 U24.8
  LAYER3 w0.127: v1(48.77,38.57) 48.77,41.32 49.24,41.79 49.24,42.2 48.77,42.67 48.77,45.55 53.61,50.39 56.09,50.39 56.35,50.13 57.26,50.13 60.45,53.31 60.45,72.56 50.93,82.08 J31.3
N230360: length 16.6
  TOP w0.127: v1(44.42,25.95) 42.37,25.95 40.01,23.59 Y1.1 38.07,23.59 C12.2 ; v1(47.07,26.25) 47.07,26.75 47.02,26.8 47.02,31.22 46.78,31.46 U24.47
  LAYER3 w0.127: v1(44.42,25.95) 46.76,25.95 v1(47.07,26.25)
N230438: length 16.1
  TOP w0.127: v1(47.27,22.9) 45.06,22.9 45.02,22.94 C13.2 43.61,22.94 43.48,22.81 43.48,22.09 42.79,21.39 Y1.3 ; U24.46 46.28,31.46 46.76,30.97 46.76,27.83 v1(46.28,27.35)
  LAYER2 w0.127: v1(46.28,27.35) 46.28,23.73 46.75,23.25 46.92,23.25 v1(47.27,22.9)
N230478: length 13.9
  TOP w0.127: U24.5 48.07,34.29 48.81,35.04 48.96,35.04 50.04,36.11 50.04,36.26 51.18,37.4 51.18,39.88 51.3,39.99 51.3,40.4 51.18,40.52 51.18,43.4 51.5,43.71 C14.2 53.64,43.71 53.65,43.73 Y2.2
N230498: length 16.4
  TOP w0.127: C15.2 57.65,43.74 57.63,43.73 Y2.1 55.91,40.51 55.37,39.97 54.28,39.97 53.92,39.6 53.74,39.6 50.29,36.16 50.29,36.01 49.06,34.78 48.92,34.78 48.39,34.25 48.39,34.17 48.33,34.11 48.33,34.01 48.11,33.79 U24.4
N230506: length 7.5
  TOP w0.127: U24.1 49.14,32.29 49.39,32.04 L10.1 50.61,31.5 51.36,30.75 L9.1 52.82,29.67 52.74,29.59 C16.1
N230650: length 9
  TOP w0.127: L12.1 C20.2 55.51,32.69 55.5,32.68 54.77,32.68 ; 54.77,32.68 54.77,31.11 54.41,30.75 L9.2 ; 54.77,32.68 54.77,33.03 ; C18.1 54.33,34.73 54.77,34.3 54.77,33.03 ; 54.77,33.03 54.78,33.05
N230674: length 15.1
  TOP w0.127: U24.3 48.69,33.29 51.33,35.92 51.33,36 51.74,36.41 L11.2 51.82,36.88 51.97,37.04 52.41,37.04 52.78,37.41 v1(54.41,37.41) ; C19.2 v1(49.96,39.73)
  LAYER3 w0.127: v1(54.41,37.41) 52.1,39.73 v1(49.96,39.73)
N230786: length 3.8
  TOP w0.127: L13.1 C21.2 60.9,32.72 60.87,32.69 L12.2
N230798: length 4
  TOP w0.127: L13.2 65.95,32.72 65.98,32.74 C22.2 67.81,32.74 67.82,32.75 C23.1
N230810: length 3.7
  TOP w0.127: C23.2 L14.1 C24.1
N230822: length 8.3
  TOP w0.127: J28.1 L15.1 75.39,32.78 75.36,32.75 C24.2
N230838: length 7.9
  TOP w0.127: U24.2 49.13,32.79 49.43,33.08 L10.2 50.61,33.92 51.42,34.73 C18.2 52.87,35.93 52.86,35.94 L11.1
N230878: length 1.6
  TOP w0.127: C17.2 42.28,39.33 U24.23

## Copper pours and planes (outline as drawn; the poured copper is in the pictures)
GND on TOP: 1.52,94.36 88.65,94.36 88.65,1.52 1.52,1.52 ; 15 cut-outs
GND on BOTTOM: 1.52,94.36 88.65,94.36 88.65,1.52 1.52,1.52 ; 1 cut-out

## Text on the board
Ref Des/Silkscreen Top: Aymen Benylles | EST TEAM | revK | CubeSat | Command and Comms | (10/1/21)
